# Altium PCB PCB1.PcbDoc
Units mm, origin at the board's own origin, x right, y up, seen from the top; angles counter-clockwise.
Board outline 50 x 50 mm, 2 copper layers (Top Layer, Bottom Layer); 15 components, 12 nets, 38 pads, 0 vias.
Unrouted connection lines stored in the file: 1.
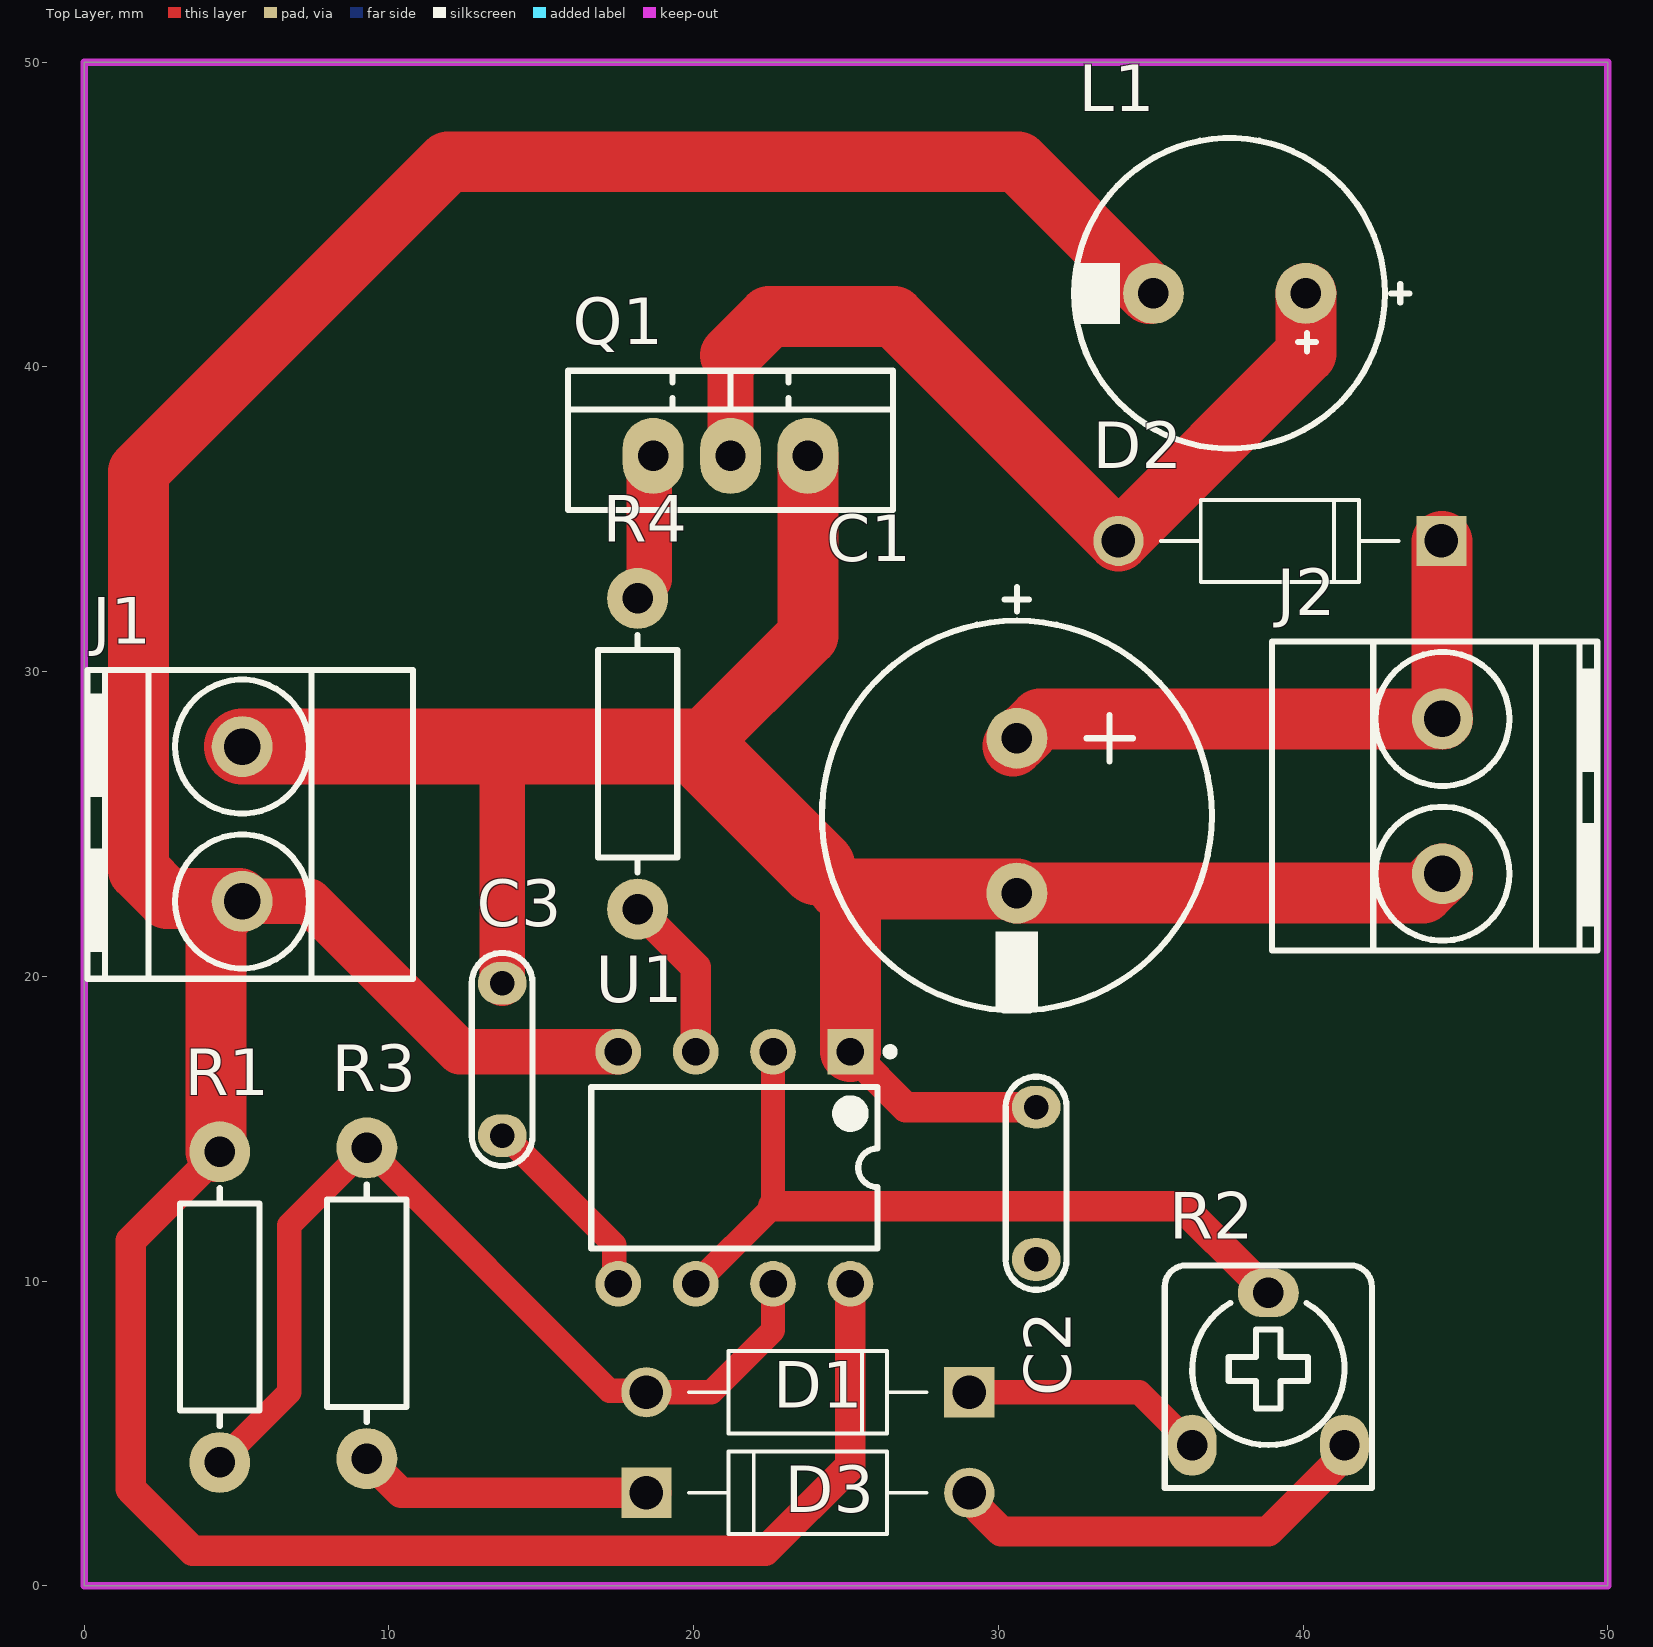
[diagram p0: Top Layer view]
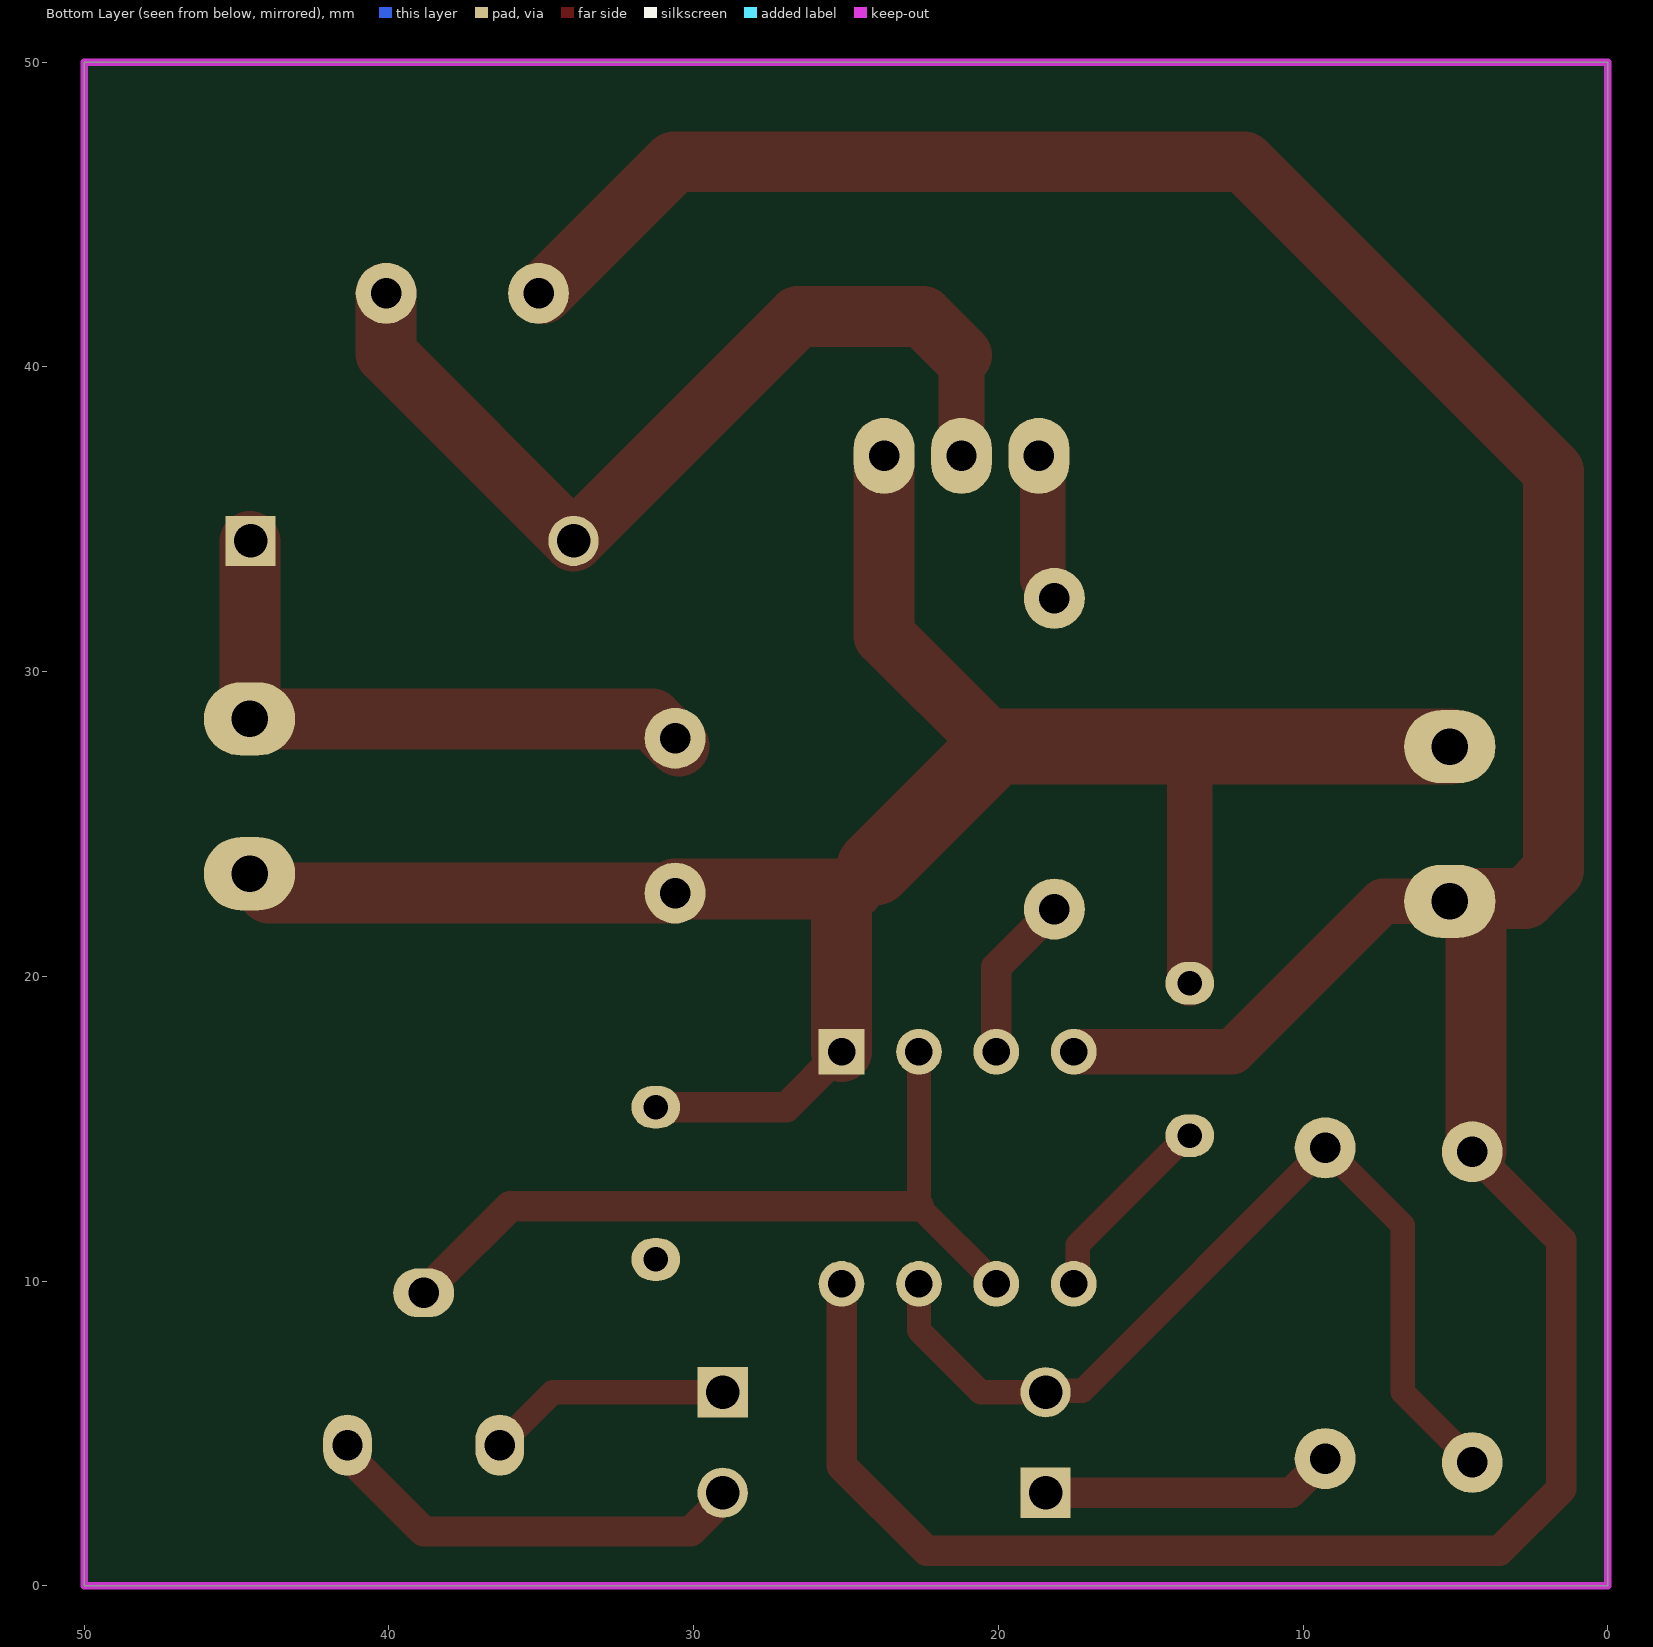
[diagram p1: Bottom Layer view, seen from below]
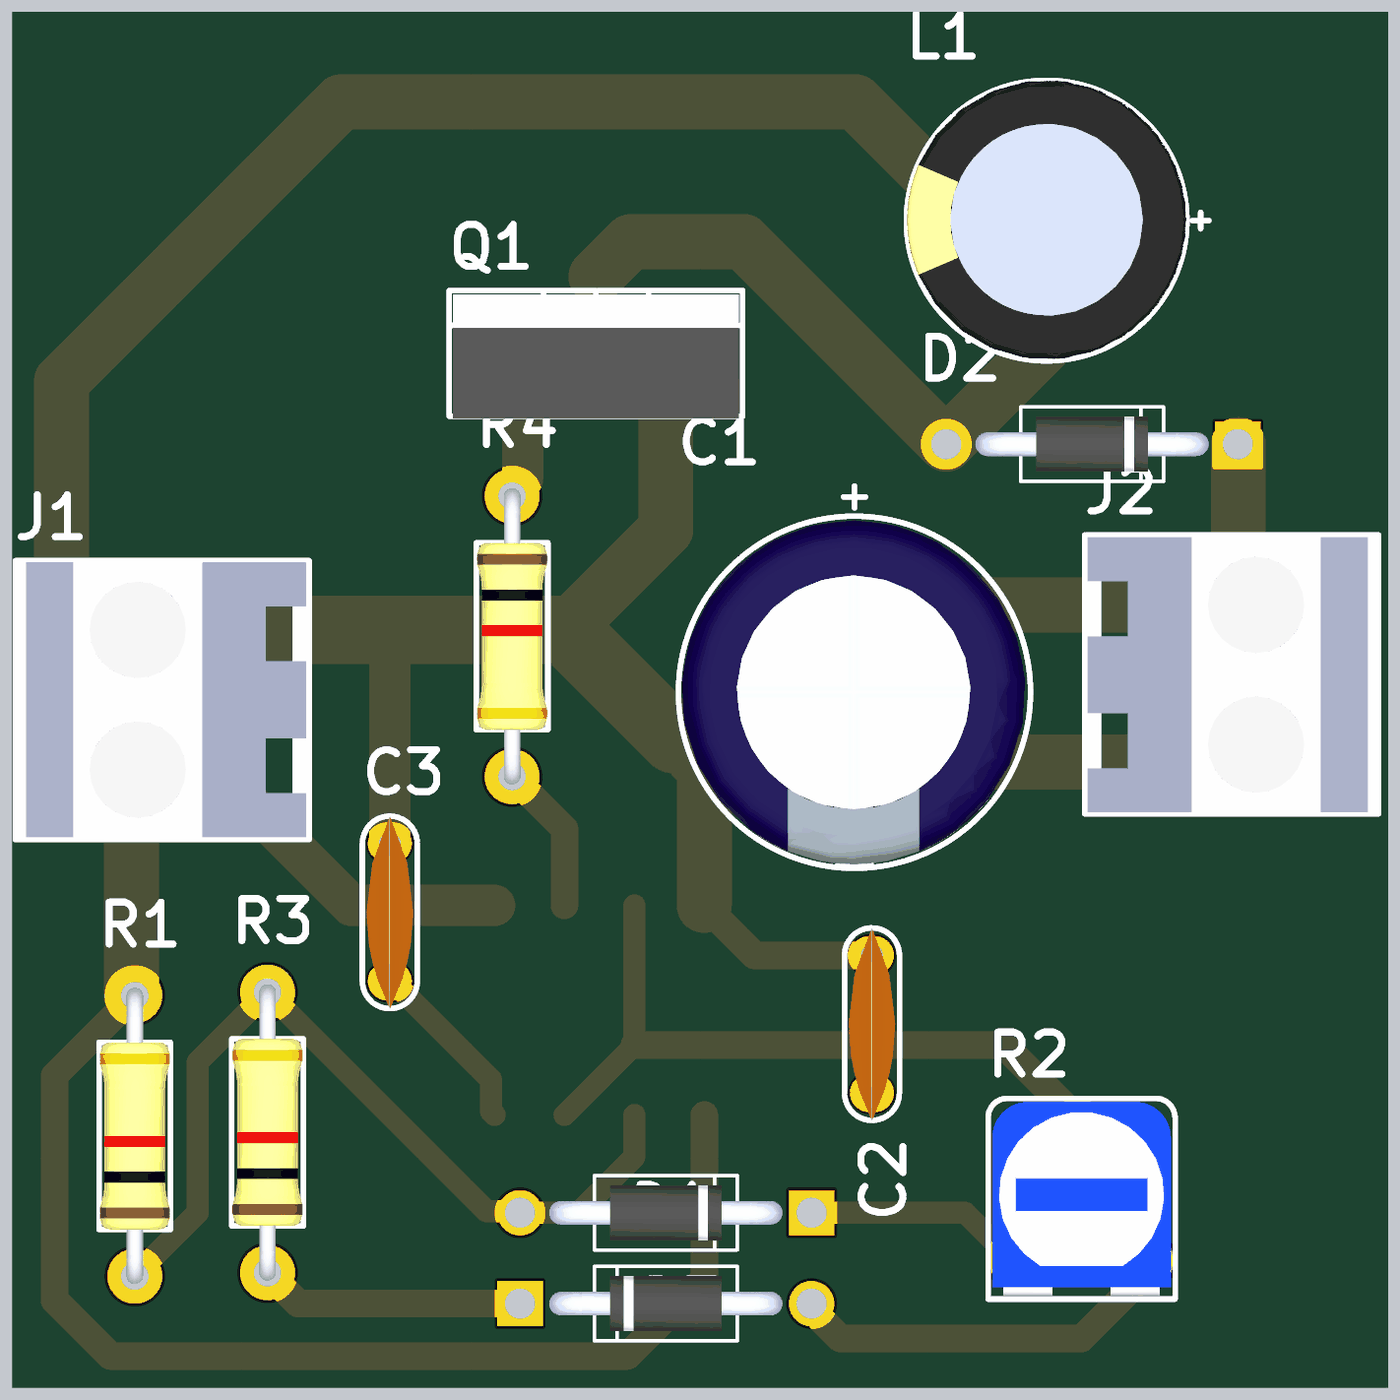
[diagram p2: 3D render of the assembled board from above, using the file's embedded part models]

## Layer stack, top to bottom
Top Solder: solder mask 0.0102, Solder Resist, Dk 3.5
Top Layer: signal copper 0.0356
Dielectric 1: dielectric 0.32, FR-4, Dk 4.8
Bottom Layer: signal copper 0.0356
Bottom Solder: solder mask 0.0102, Solder Resist, Dk 3.5

## Board outline
0,0 50,0 50,50 0,50

## Design rules (kind name [scope] priority, off if disabled: settings)
Clearance [All] p1: gap=0.25 ignorepadtopadclearanceinfootprint=FALSE
PolygonConnect [All] p1: connectstyle=Relief reliefconductorwidth=0.254 reliefentries=4 polygonreliefangle="90 Angle" airgapwidth=0.254
RoutingVias [All] p1: holewidth=0.711 width=1.27 viastyle="Through Hole" minholewidth=0.711 minwidth=1.27 maxholewidth=0.711 maxwidth=1.27
ShortCircuit [All] p1: allowed=TRUE
SolderMaskExpansion [All] p1: expansion=0.102 istentingtop=FALSE
UnRoutedNet [All] p1: checkbadconnections=TRUE
Width [All] p1: maxlimit=3 minlimit=0.3 preferedwidth=0.5
28 further rules are at their usual default settings.

## Components (designator, comment, footprint, x,y, rotation, side; value= is the part's Value field where it differs from the comment)
C1 "100uF" C_EL_12X25 30.607,25.273 r270 top
C2 "1nF" C_CER_D7A 31.242,13.208 r270 top
C3 "100nF" C_CER_D7A 13.716,17.272 r270 top
D1 "1N4007" DIOAD1060W80L520D270 23.749,6.35 r180 top
D2 "1N4007" DIOAD1060W80L520D270 39.243,34.29 r180 top
D3 "1N4007" DIOAD1060W80L520D270 23.749,3.048 r0 top
J1 "con_x2" TBG_2 5.182,25 r90 top net-tie
J2 "con_x2" TBG_2 44.577,25.908 r270 top net-tie
L1 "2mH" C_EL_10X20 37.592,42.418 r180 top
Q1 "IRF640" TO220_3 21.209,37.084 r0 top
R1 "1K" R025W_AX04 4.445,9.144 r90 top
R2 "POT10K" POT_7X5 38.862,7.112 r0 top
R3 "1K" R025W_AX04 9.271,9.271 r90 top
R4 "220" R025W_AX04 18.161,27.305 r270 top
U1 "NE555" NE555 -1.524,58.928 r270 top

## Footprints (in the part's own frame and the unit in brackets; to place one, negate y for a bottom-side part, rotate by r counter-clockwise, add the part's x,y. Pads: shape width x height; smd on the part's side, far side on the other; paste and mask are expansions set on the pad)
C_CER_D7A [mm] "CAP, CER MULTILAYER, 7.0X1.7mm, pitch: 5.0mm"
  oval 1.4x1.6 hole 0.8 mask+0.075: 1(-2.5,0) 2(2.5,0)
  silkscreen extent -3.5,-1 3.5,1, body extent -3.5,-0.85 3.5,0.85
C_EL_10X20 [mm] "Cap Elec, D10.0X20.0H pitch: 5.0mm, RB.2/.4"
  round 2 hole 1: 1(-2.5,0) 2(2.5,0)
  silkscreen extent -5.9,-5.1 5.1,5.1, body extent -5.08,-5.1 5.08,5.04, height 20.62
C_EL_12X25 [mm] "Cap Elec, D12.0X25.0H pitch: 5.0mm, RB.2/.5"
  round 2 hole 1: 1(-2.54,0) 2(2.54,0)
  silkscreen extent -7.5,-6.4 6.4,6.4, body extent -6.25,-6.27 6.25,6.21, height 25.8
DIOAD1060W80L520D270 [mm]
  round 1.65 hole 1.1: A(5.3,0)
  rect 1.65x1.65 / inner round 1.65 / far side rect 1.65x1.65 hole 1.1: C(-5.3,0)
  silkscreen extent -3.9,-1.35 3.9,1.35, body extent -4.24,-1 4.24,1, height 2
NE555 [mm]
  rect 1.5x1.5 hole 0.9: 1(41.402,26.67)
  round 1.5 hole 0.9: 2(41.402,24.13) 3(41.402,21.59) 4(41.402,19.05) 5(49.022,19.05) 6(49.022,21.59) 7(49.022,24.13) 8(49.022,26.67)
  silkscreen extent 41.28,18.16 47.86,28.1, body extent 41.28,18.16 49.15,27.56, height 4.36
POT_7X5 [mm] "POT, TRIM, 7.5X5.0mm, pitch: 5.0mm"
  oval 1.6x2 hole 1: 1(-2.5,-2.5) 3(2.5,-2.5)
  oval 2x1.6 hole 1: 2(0,2.5)
  silkscreen extent -3.4,-3.9 3.4,3.4, body extent -3.25,-3.78 3.25,3.27, height 7
R025W_AX04 [mm] "RESISTOR 1/4 WATT, AXIAL0.4"
  round 2 hole 1: 1(-5.1,0) 2(5.1,0)
  silkscreen extent -3.9,-1.3 3.9,1.3, body extent -5.38,-1.28 5.38,1.28, height 2.6
TBG_2 [mm] "Terminal Block Green"
  round 2 / inner round 2 / far side oval 2.4x3 hole 1.2: 1(-2.54,0) 2(2.54,0)
  silkscreen extent -5.08,-5.6 5.05,5.08, body extent -5,-5.5 5,5, height 14
TO220_3 [mm] "TO-220 3 LEAD, TO-262, pitch: 2.54mm  10x4.5mm"
  oval 2x2.5 hole 1: 1(-2.54,0) 2(0,0) 3(2.54,0)
  silkscreen extent -5.33,-1.78 5.33,2.79, body extent -5.2,-1.85 5.2,2.65, height 19

## Part data
C1: library part CAP_THD_EL_10X20, "CAP, THD, ELEC,", ASSEMBLY=ASSEMBLY, DESC=DESCRIPTION, DIST#=MOUSER, MANF=MANF, MANF_P#=MANF_PART#, PARAM=20%, PARAM2=25V, PRICE="10= 5$"
C2 C3: library part CAP_THD_CERML, "CAP, THD, CER MULTI LAYER,", ASSEMBLY=ASSEMBLY, DESC="CAP, CER MULTI LAYER,", MANF=MANF, MANF_P#=MANF_PART#, PARAM2=50V, PRICE="100= 1$"
D1 D2 D3: "Diode Standard 1000 V 1A Through Hole DO-41", Package="DO-41 NTE Electronics", Availability="In Stock", Check_prices=https://www.snapeda.com/parts/1N4007/NTE+Electronics/view-part/?ref=eda, MF="NTE Electronics, Inc.", MP=1N4007, PRICE=None, Purchase-URL=https://pricing.snapeda.com/search/part/1N4007/?ref=eda, SnapEDA_Link=https://www.snapeda.com/parts/1N4007/NTE+Electronics/view-part/?ref=snap
L1: library part IND_THD, "INDUCTOR, THD"
Q1: library part MOSN_IRF640_TO220, "MOSFET, N-CH, 0.15RDS, 18A, 300VDS, 2~4VGSth", ASSEMBLY=ASSEMBLY, MANF="VISHAY, ON", MANF_P#=IRF640, PARAM="0.15RDS, 18A, -55~175oC", PARAM2="200VDS, 2~4VGSth", PRICE="0.9$, 1500toman@PAYA"
R1 R3 R4: library part RES_THD, "RESISTOR, THD", ASSEMBLY=ASSEMBLY, DESC=DESCRIPTION, DIST#=MOUSER, MANF="KOA SPEER", MANF_P#=RK73H1ETTP4701F, PARAM=0.063W, PARAM2=1%, PRICE="100= 0.5$"
R2: library part RES_THD_POT_VOLUME, "RESISTOR, THD, Potentiometer Volume"

## Nets (pads, with @x,y where several pads share a name; then routed paths per layer and width w, separated by ;. In a path a pad name is that pad's centre, name@x,y a point inside that pad or via, vN(x,y) a via of type N, cw(c..) or ccw(c..) an arc to the next point about the centre after c; other vN are vias at no path point)
GND: C1.2 C2.1 C3.1 J1.2 J2.2 Q1.3 U1.1 | length 73.2
  Top Layer w0.8: 13.716,26.416 14.84,27.54
  Top Layer w1: U1.1 26.964,15.708 C2.1
  Top Layer w1.5: C3.1 13.716,26.416 ; 20.096,27.54 20.594,27.042 ; 24.063,23.573 25.146,22.49
  Top Layer w2: 20.096,27.54 23.749,31.193 Q1.3 ; 24.776,22.86 C1.2@30.607,22.86 ; U1.1 25.146,22.49 ; C1.2 43.942,22.733 J2.2
  Top Layer w2.5: J1.2 14.84,27.54 20.096,27.54 ; 20.594,27.042 24.063,23.573
NetC3_2: C3.2 U1.5 | length 6.5
  Top Layer w0.8: C3.2 13.816,14.772 17.392,11.196 17.392,10.04 U1.5
NetD1_A: D1.A R1.1 R3.2 U1.7 | length 31.5
  Top Layer w0.8: R1.1@4.316,3.935 6.731,6.35 6.731,11.831 R3.2 17.239,6.403 18.396,6.403 D1.A 20.574,6.35 22.606,8.382 U1.7
NetD1_C: D1.C R2.1 | length 8
  Top Layer w0.8: D1.C 34.624,6.35 R2.1
NetD2_A: D2.A L1.1 Q1.2 | length 30.3
  Top Layer w1.5: Q1.2 21.209,40.386
  Top Layer w2: 21.209,40.386 22.479,41.656 26.577,41.656 D2.A 40.092,40.439 L1.1
NetD3_A: D3.A R2.3 | length 14.6
  Top Layer w1: D3.A@28.749,3.162 28.759,3.162 29.374,2.547 29.374,2.503 30.099,1.778 38.862,1.778 41.362,4.278 R2.3
NetD3_C: D3.C R3.1 | length 10
  Top Layer w1: R3.1 10.394,3.048 D3.C@18.774,3.048
NetQ1_1: Q1.1 R4.1 | length 4.2
  Top Layer w1.5: R4.1@18.542,33.036 Q1.1@18.542,36.821 ; Q1.1@18.669,36.699 Q1.1
puls_mosfet: R4.2 U1.3 | length 5.5
  Top Layer w1: R4.2 20.066,20.3 U1.3
THR: C2.2 R2.2 U1.2 U1.6 | length 26.1
  Top Layer w0.8: U1.6 22.606,12.446 U1.2
  Top Layer w1: 22.606,12.446 31.242,12.446 31.973,12.446 36.028,12.446 38.362,10.112 38.362,10.074 38.824,9.612 R2.2
VCC_in: J1.1 L1.2 R1.2 U1.4 U1.8 | length 123.1
  Top Layer w1: R1.2 1.524,11.323 1.524,3.175 3.556,1.143 22.352,1.143 25.146,3.937 U1.8
  Top Layer w1.5: 4.318,21.461 5.182,22.325 J1.1 ; J1.1@5.086,22.556 J1.1 ; U1.4 12.319,17.526 7.385,22.46 J1.1 ; L1.2@34.957,42.418 L1.2
  Top Layer w2: R1.2@4.318,14.244 4.318,21.461 ; J1.1@5.086,22.556 2.717,22.556 1.778,23.495 1.778,36.576 11.938,46.736 30.639,46.736 L1.2@34.957,42.418
Vo: C1.1 D2.C J2.1 | length 20.3
  Top Layer w1.5: D2.C D2.C@44.56,34.273 ; J2.1@44.56,28.465 J2.1
  Top Layer w2: C1.1@30.48,27.559 30.67,27.749 31.369,28.448 J2.1 ; J2.1@44.56,28.465 D2.C@44.56,34.273

## Keep-outs
Keep-Out Layer:
  lines w0.254: 81.407,70.993 82.169,71.755 ; 105.41,58.801 105.537,58.928 ; 105.41,71.755 105.537,71.882 ; 0,0 0,50 50,50 50,0 0,0